# Altium PCB VoiceRecorder1.PcbDoc
Units mm, origin at the board's own origin, x right, y up, seen from the top; angles counter-clockwise.
Board outline 107.31 x 58.55 mm, 2 copper layers (Top Layer, Bottom Layer); 33 components, 36 nets, 132 pads, 0 vias.
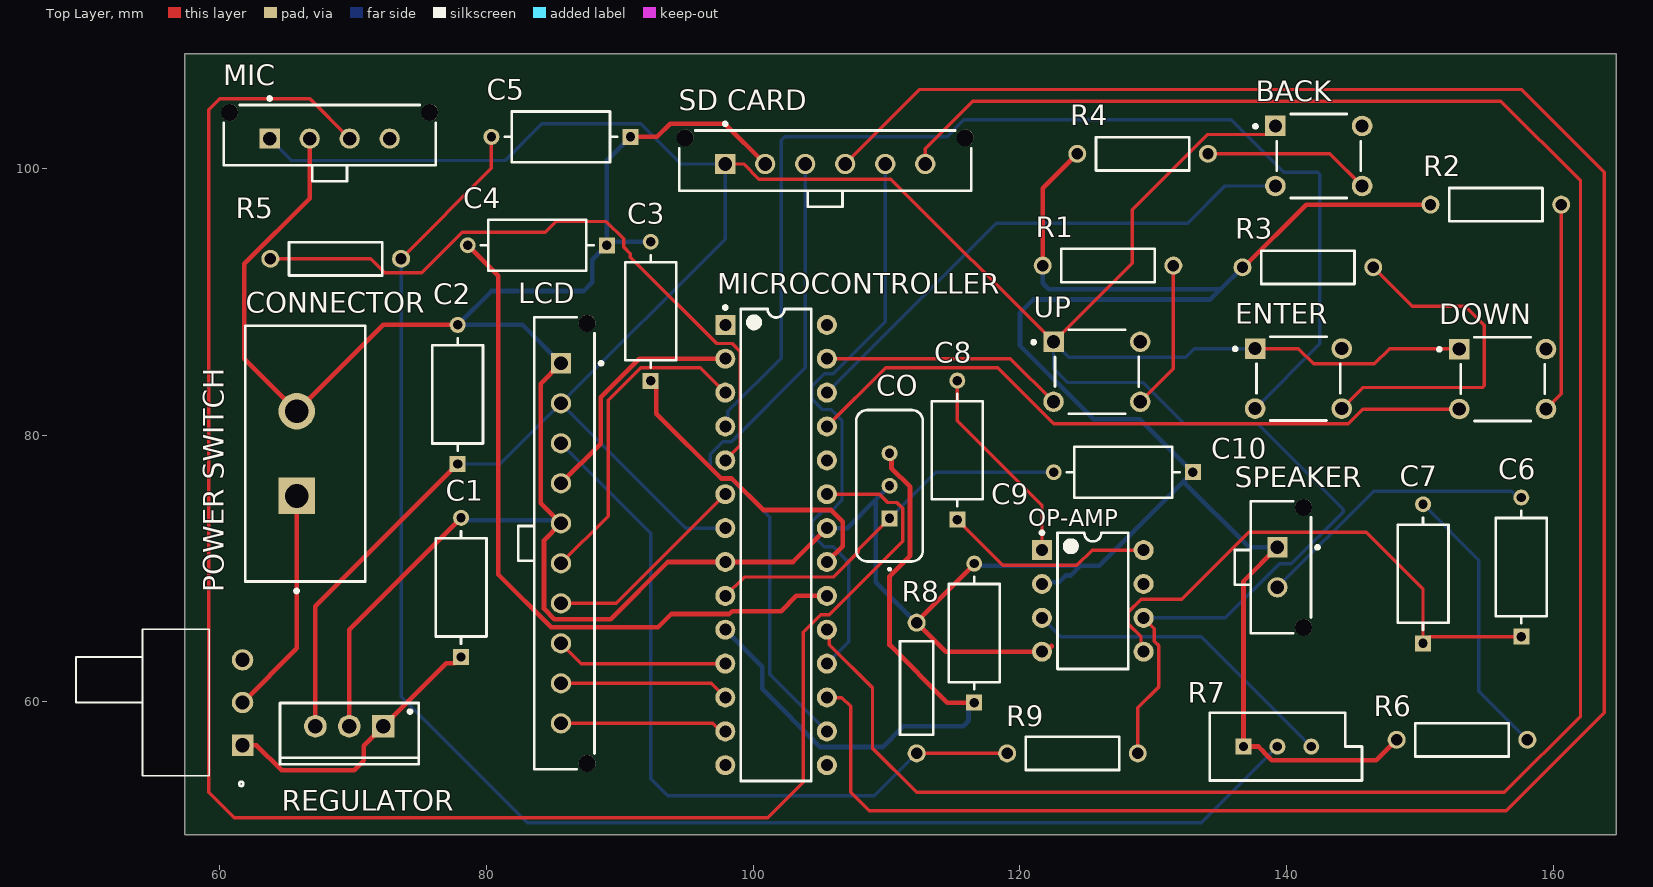
[diagram p0: Top Layer view]
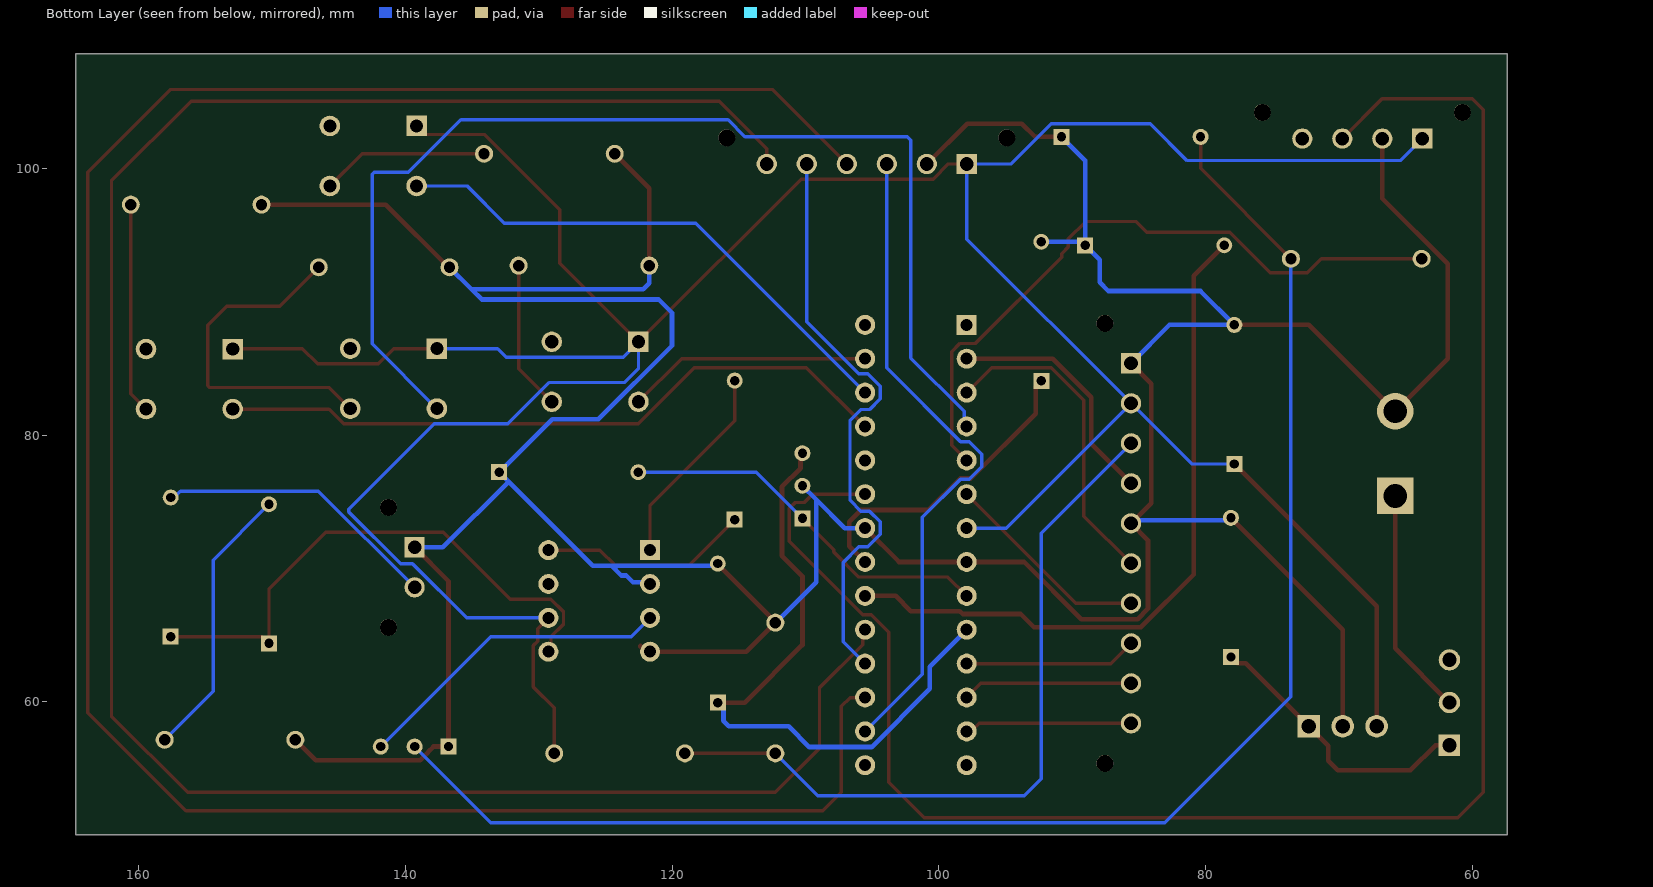
[diagram p1: Bottom Layer view, seen from below]
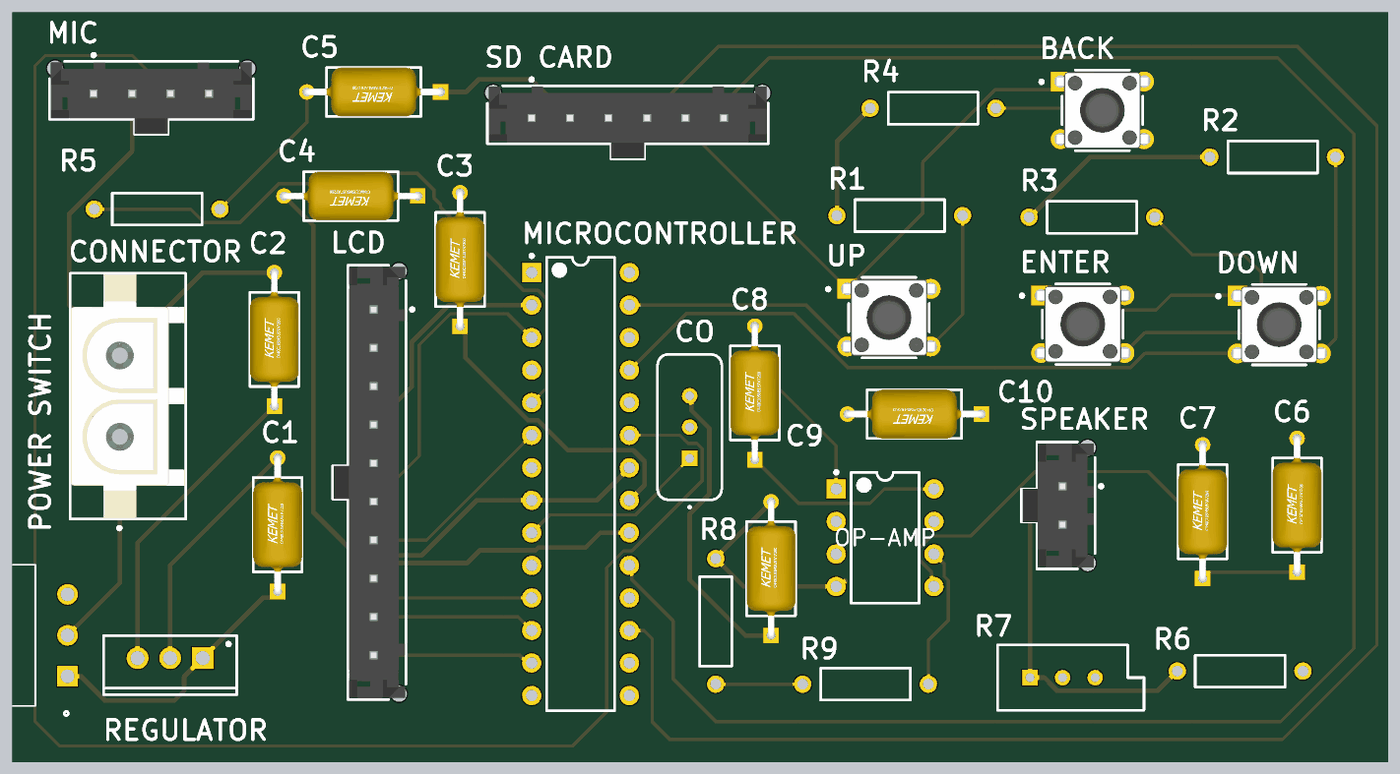
[diagram p2: 3D render of the assembled board from above, using the file's embedded part models]

## Layer stack, top to bottom
Top Solder: solder mask 0.0102, Solder Resist, Dk 3.5
Top Layer: signal copper 0.0356
Dielectric 1: dielectric 0.32, FR-4, Dk 4.8
Bottom Layer: signal copper 0.0356
Bottom Solder: solder mask 0.0102, Solder Resist, Dk 3.5

## Board outline
57.404,50.038 164.719,50.038 164.719,108.585 57.404,108.585

## Design rules (kind name [scope] priority, off if disabled: settings)
Clearance [All] p1: gap=0.254 ignorepadtopadclearanceinfootprint=FALSE except(0: Arc-Hole Track-Hole SMDPad-Hole THPad-Hole Via-Hole Fill-Hole Poly-Hole Region-Hole Text-Hole)
MinimumSolderMaskSliver [All] p1: minsoldermaskwidth=0.244
PolygonConnect [All] p1: connectstyle=Relief reliefconductorwidth=0.254 reliefentries=4 polygonreliefangle="90 Angle" airgapwidth=0.254
RoutingVias [All] p1: holewidth=0.711 width=1.27 viastyle="Through Hole" minholewidth=0.711 minwidth=1.27 maxholewidth=0.711 maxwidth=1.27
SilkToSolderMaskClearance [IsPad] p1 off: minsilkscreentomaskgap=0.254 clearancetoexposedcopper=TRUE
SolderMaskExpansion [All] p1: expansion=0.102 istentingtop=FALSE
Width [InNet('GND')] p1: maxlimit=0.35 minlimit=0.254 preferedwidth=0.35 minimp=50.000000 maximp=50.000000 favimp=50.000000
28 further rules are at their usual default settings.

## Components (designator, comment, footprint, x,y, rotation, side; value= is the part's Value field where it differs from the comment)
BACK "3-1825910-1" FP-3-1825910-1-MFG 142.419,100.929 r0 top
C1 "1uF" FP-C440-MFG 78.105,68.58 r90 top
C2 "1uF" FP-C440-MFG 77.851,83.05 r90 top
C3 "100nF" FP-C440-MFG 92.329,89.281 r90 top value=1uF
C4 "100nF" FP-C440-MFG 83.82,94.234 r180 top value=1uF
C5 "100nF" FP-C440-MFG 85.598,102.362 r180 top value=1uF
C6 "250uF" FP-C440-MFG 157.607,70.104 r90 top value=1uF
C7 "0.05uF" FP-C440-MFG 150.241,69.596 r90 top value=1uF
C8 "10uF" FP-C440-MFG 115.316,78.867 r90 top value=1uF
C9 "22pF" FP-C440-MFG 116.586,65.151 r90 top value=1uF
C10 "22pF" FP-C440-MFG 127.762,77.216 r180 top value=1uF
CO "ECS-200-20-4X" ECS-4X-3IL 110.236,76.2 r90 top
CONNECTOR "350428-1" FP-350428-1-MFG 66.421,78.613 r90 top
DOWN "3-1825910-1" FP-3-1825910-1-MFG 156.21,84.201 r0 top
ENTER "3-1825910-1" FP-3-1825910-1-MFG 140.895,84.237 r0 top
LCD "66201011122" 66201011122 85.852,71.882 r90 top
MIC "66200411122" 66200411122 68.254,102.49 r180 top
MICROCONTROLLER "ATmega328-PU" 28P3 101.727,71.755 r0 top
OP-AMP "LM386N-3" TI-P8 125.476,67.564 r0 top
"POWER SWITCH" "1825116-1" SW_1825116-1 61.722,56.744 r90 top
R1 "10k" OMTE-RES7X2.5-2 126.619,92.71 r0 top
R2 "10k" OMTE-RES7X2.5-2 155.702,97.282 r0 top
R3 "10k" OMTE-RES7X2.5-2 141.605,92.583 r0 top
R4 "10k" OMTE-RES7X2.5-2 129.212,101.092 r0 top
R5 "470" OMTE-RES7X2.5-2 68.707,93.218 r180 top
R6 "10k" OMTE-RES7X2.5-2 153.162,57.15 r0 top
R7 "RPot" VR5 139.319,56.642 r0 top value=10K
R8 "8k" OMTE-RES7X2.5-2 112.268,61.034 r90 top
R9 "2k" OMTE-RES7X2.5-2 123.952,56.134 r0 top
REGULATOR "L7805CV" TO220 69.723,58.166 r180 top
"SD CARD" "66200611122" 66200611122 105.41,100.584 r180 top
SPEAKER "66200211122" 66200211122 139.574,70.08 r90 top
UP "3-1825910-1" FP-3-1825910-1-MFG 125.782,84.745 r0 top

## Footprints (in the part's own frame and the unit in brackets; to place one, negate y for a bottom-side part, rotate by r counter-clockwise, add the part's x,y. Pads: shape width x height; smd on the part's side, far side on the other; paste and mask are expansions set on the pad)
28P3 [mm] "28-Pin Plastic Dual In-Line Package (PDIP)"
  rect 1.5x1.5 hole 0.9: 1(-3.81,16.51)
  round 1.5 hole 0.9: 2(-3.81,13.97) 3(-3.81,11.43) 4(-3.81,8.89) 5(-3.81,6.35) 6(-3.81,3.81) 7(-3.81,1.27) 8(-3.81,-1.27) 9(-3.81,-3.81) 10(-3.81,-6.35) 11(-3.81,-8.89) 12(-3.81,-11.43) 13(-3.81,-13.97) 14(-3.81,-16.51) 15(3.81,-16.51) 16(3.81,-13.97) 17(3.81,-11.43) 18(3.81,-8.89) 19(3.81,-6.35) 20(3.81,-3.81) 21(3.81,-1.27) 22(3.81,1.27) 23(3.81,3.81) 24(3.81,6.35) 25(3.81,8.89) 26(3.81,11.43) 27(3.81,13.97) 28(3.81,16.51)
  silkscreen extent -3.93,-17.7 2.65,17.93, body extent -3.6,-17.65 3.6,17.65, height 4.58
66200211122 [mm] "3.00mm Male Single Row Vertical Header, 2p"
  rect 1.52x1.52 hole 1.02: 1(1.5,0.255)
  round 1.52 hole 1.02: 2(-1.5,0.255)
  round 1.27 hole 1.27 unplated: MH1(-4.5,-1.705) MH2(4.5,-1.705)
  silkscreen extent -4.95,-2.88 4.95,3.46, body extent -4.83,-2.18 4.83,3.38, height 9.93
66200411122 [mm] "3.00mm Male Single Row Vertical Header, 4p"
  rect 1.52x1.52 hole 1.02: 1(4.5,0.255)
  round 1.52 hole 1.02: 2(1.5,0.255) 3(-1.5,0.255) 4(-4.5,0.255)
  round 1.27 hole 1.27 unplated: MH1(-7.5,-1.705) MH2(7.5,-1.705)
  silkscreen extent -7.95,-2.87 7.95,3.46, body extent -7.82,-2.19 7.83,3.38, height 9.93
66200611122 [mm] "3.00mm Male Single Row Vertical Header, 6p"
  rect 1.52x1.52 hole 1.02: 1(7.5,0.255)
  round 1.52 hole 1.02: 2(4.5,0.255) 3(1.5,0.255) 4(-1.5,0.255) 5(-4.5,0.255) 6(-7.5,0.255)
  round 1.27 hole 1.27 unplated: MH1(-10.5,-1.705) MH2(10.5,-1.705)
  silkscreen extent -10.95,-2.87 10.95,3.46, body extent -10.82,-2.19 10.83,3.38, height 9.93
66201011122 [mm] "3.00mm Male Single Row Vertical Header, 10p"
  rect 1.52x1.52 hole 1.02: 1(13.5,0.255)
  round 1.52 hole 1.02: 2(10.5,0.255) 3(7.5,0.255) 4(4.5,0.255) 5(1.5,0.255) 6(-1.5,0.255) 7(-4.5,0.255) 8(-7.5,0.255) 9(-10.5,0.255) 10(-13.5,0.255)
  round 1.27 hole 1.27 unplated: MH1(-16.5,-1.705) MH2(16.5,-1.705)
  silkscreen extent -16.95,-2.88 16.95,3.46, body extent -16.82,-2.19 16.83,3.38, height 9.93
ECS-4X-3IL [mm]
  rect 1.2x1.2 hole 0.7: 1(-2.44,0)
  round 1.2 hole 0.7: 2(0,0) 3(2.44,0)
  silkscreen extent -6.34,-2.5 5.68,2.5, body extent -5.68,-2.5 5.68,2.5, height 3.5
FP-3-1825910-1-MFG [mm]
  rect 1.54x1.54 hole 0.99 paste-1000 mask+0: 1(-3.25,2.25)
  round 1.54 hole 0.99 paste-1000 mask+0: 2(3.25,2.25) 3(-3.25,-2.25) 4(3.25,-2.25)
  silkscreen extent -4.87,-3.15 3.15,3.15, body extent -4.12,-3.24 4.12,3.24, height 0.25
FP-350428-1-MFG [mm]
  rect 2.73x2.73 hole 1.78 paste-1000 mask+0: 1(-3.175,0.635)
  round 2.73 hole 1.78 paste-1000 mask+0: 2(3.175,0.635)
  silkscreen extent -10.42,-4.51 9.59,4.51, body extent -9.69,-4.61 9.69,4.61, height 0.25
FP-C440-MFG [mm]
  rect 1.2x1.2 hole 0.7 paste-1000 mask+0: 1(-5.215,0)
  round 1.2 hole 0.7 paste-1000 mask+0: 2(5.215,0)
  silkscreen extent -4.21,-1.91 4.21,1.91, body extent -5.91,-2 5.91,2, height 0.25
OMTE-RES7X2.5-2 [mm] "Resistor, Axial; Body 7x2.5mm, Lead Dia. 0.6mm"
  round 1.35 hole 0.85: 1(-4.9,0) 2(4.9,0)
  silkscreen extent -3.5,-1.25 3.5,1.25, body extent -3.5,-1.25 3.5,1.25, height 2.5
SW_1825116-1 [mm]
  rect 1.605x1.605 hole 1.07: 1(0,0)
  round 1.605 hole 1.07: 2(3.2,0) 3(6.4,0)
  silkscreen extent -3.06,-0.06 8.7,12.5
TI-P8 [mm] "DIP, 8-Leads, Body 10.15x6.6mm, Pitch 2.54mm"
  rect 1.5x1.5 hole 0.9: 1(-3.81,3.81)
  round 1.5 hole 0.9: 2(-3.81,1.27) 3(-3.81,-1.27) 4(-3.81,-3.81) 5(3.81,-3.81) 6(3.81,-1.27) 7(3.81,1.27) 8(3.81,3.81)
  silkscreen extent -3.93,-5.1 2.65,5.23, body extent -3.95,-5.07 3.95,5.07, height 5.08
TO220 [mm] "TO, Thru-Hole, Vertical, Heatsink Mounted; 3 In-Line Leads; Pitch 2.54 mm"
  rect 1.7x1.7 hole 1.1: 1(-2.54,0)
  round 1.7 hole 1.1: 2(0,0) 3(2.54,0)
  silkscreen extent -5.2,-1.75 5.2,2.85, body extent -5.25,-1.8 5.25,2.9, height 19.7
VR5 [mm] "Thru-Hole; 3 Leads"
  rect 1.2x1.2 hole 0.7: 1(-2.54,0)
  round 1.2 hole 0.7: 2(0,0) 3(2.54,0)
  silkscreen extent -5.08,-2.54 6.35,2.54

## Part data
BACK DOWN ENTER UP: library part CMP-03407-000001-1, "SWITCH TACTILE SPST-NO 0.05A 24V", Contact Current Rating=50mA, Contact Resistance=100mΩ, Manufacturer="TE Connectivity", Operating Force=160gf, Package=0, Temperature="-35°C to +85°C", Temperature Range High=+85°C, Temperature Range Low=-35°C, Automotive=No, Category=Switch, ComponentLink2Description=Datasheet, ComponentLink2URL=https://www.te.com/commerce/DocumentDelivery/DDEController?Action=srchrtrv&DocNm=1825910&DocType=Customer+Drawing&DocLang=English, Device Class L1=Electromechanical, Device Class L2=Switches, Device Class L3="Tactile Switches", Digikey Description="SWITCH TACTILE SPST-NO 0.05A 24V", Electromechanical Life=100000Cycles, Height=17.3mm, Lead Free=Yes, Manufacturer Part Number=3-1825910-1, Mount="Through Hole", Octopart=https://octopart.com/3-1825910-1-te+connectivity-46506874, RoHS=TRUE, Throw Configuration=SPST-NO
C1 C2: library part CMP-03020-013956-1, "CAP CER 1UF 50V Z5U AXIAL", Manufacturer=Kemet, Manufacturer Part Number=C440C105M5U5TA7200, Package=C440, Temperature="-10°C to +85°C", Temperature Characteristic=Z5U, Temperature Range High=+85°C, Temperature Range Low=-10°C, Tolerance=20%, Voltage Rating=50V, Automotive=No, Capacitance=1uF, Category=Cap, ComponentLink2Description=Datasheet, ComponentLink2URL=https://content.kemet.com/datasheets/KEM_C1042_AXIMAX_Z5U.pdf, Device Class L1="Passive Components", Device Class L2=Capacitors, Device Class L3="Ceramic Capacitors", Digikey Description="CAP CER 1UF 50V Z5U AXIAL", Height=3.81mm, Ipc Land Pattern Name=CAPAD1043W70L736D381, Lead Free=Yes, Material=Ceramic, Mouser Description="Multilayer Ceramic Capacitors MLCC - Leaded 50volts 1uF 20%", Octopart=https://octopart.com/c440c105m5u5ta7200-kemet-193612, RoHS=TRUE
C3 C4 C5 C6 C7 C8 C9 C10: library part CMP-03020-013956-1, "CAP CER 1UF 50V Z5U AXIAL", Capacitance=1uF, Manufacturer=Kemet, Manufacturer Part Number=C440C105M5U5TA7200, Package=C440, Temperature="-10°C to +85°C", Temperature Characteristic=Z5U, Temperature Range High=+85°C, Temperature Range Low=-10°C, Tolerance=20%, Voltage Rating=50V, Automotive=No, Category=Cap, ComponentLink2Description=Datasheet, ComponentLink2URL=https://content.kemet.com/datasheets/KEM_C1042_AXIMAX_Z5U.pdf, Device Class L1="Passive Components", Device Class L2=Capacitors, Device Class L3="Ceramic Capacitors", Digikey Description="CAP CER 1UF 50V Z5U AXIAL", Height=3.81mm, Ipc Land Pattern Name=CAPAD1043W70L736D381, Lead Free=Yes, Material=Ceramic, Mouser Description="Multilayer Ceramic Capacitors MLCC - Leaded 50volts 1uF 20%", Octopart=https://octopart.com/c440c105m5u5ta7200-kemet-193612, RoHS=TRUE
CO: library part CMP-1669-00001-2, "CRYSTAL 20.000MHZ 20PF 49US", Manufacturer=ECS, ComponentLink1Description=Datasheet, ComponentLink1URL=http://www.ecsxtal.com/store/pdf/hc-49usx.pdf, PackageReference=4X-3IL, PartNumber=ECS-200-20-4X
CONNECTOR: library part CMP-03369-000080-1, "CONN HEADER VERT 2POS 6.35MM", Current Rating=12A, Manufacturer="TE Connectivity", Temperature="-40°C to +105°C", Temperature Range High=+105°C, Temperature Range Low=-40°C, Voltage Rating=600V, Automotive=No, Category=Conn, ComponentLink2Description=Datasheet, ComponentLink2URL=https://www.te.com/commerce/DocumentDelivery/DDEController?Action=showdoc&DocId=Customer+Drawing%7F350428%7FY2%7Fpdf%7FEnglish%7FENG_CD_350428_Y2.pdf%7F350428-1, Conn Gender=Male, Conn Orientation=Vertical, Contact Material=Gold,Nickel, Device Class L1=Connectors, Device Class L2="Headers and Wire Housings", Device Class L3=unset, Digikey Description="CONN HEADER VERT 2POS 6.35MM", Height=14.99mm, Lead Free=Yes, Manufacturer Part Number=350428-1, Mouser Description="Connector, Soft Shell; Universal MATE-N-LOK; 2; Nylon; Natural; 19 A; 600 VAC", Number Of Contacts=2, Number Of Rows=1, Octopart=https://octopart.com/350428-1-te+connectivity-46505355, Package=350428-1, Pitch=6.35mm, RoHS=TRUE, Standoff Height=0.63mm
LCD: library part CMP-1502-00448-1, "THT Male Header WR-MPC3, Vertical, Single Row, pitch 3 mm, 10 pins", Contact Resistance=10mOhm, Manufacturer="Wurth Elektronik", Operating Temperature=-40to105degC, Working Voltage=250VAC, Datasheet URL=https://katalog.we-online.de/em/datasheet/6620xx11122.pdf, Gender=Male, Manufacturer URL=http://www.we-online.de, Mounting Technology=THT, Orientation=Vertical, Package Reference=66201011122, Packaging=Tube, Part Number=66201011122, Pin Number=10, Pitch=3mm, Publisher=WurthElektronik
MIC: library part CMP-1502-00442-1, "THT Male Header WR-MPC3, Vertical, Single Row, pitch 3 mm, 4 pins", Contact Resistance=10mOhm, Manufacturer="Wurth Elektronik", Operating Temperature=-40to105degC, Working Voltage=250VAC, Datasheet URL=https://katalog.we-online.de/em/datasheet/6620xx11122.pdf, Gender=Male, Manufacturer URL=http://www.we-online.de, Mounting Technology=THT, Orientation=Vertical, Package Reference=66200411122, Packaging=Tube, Part Number=66200411122, Pin Number=4, Pitch=3mm, Publisher=WurthElektronik
MICROCONTROLLER: library part CMP-0095-00015-2, "8-bit AVR Microcontroller, 32KB Flash, 1KB EEPROM, 2KB SRAM, 28-pin PDIP, Industrial Grade (-40°C to 85°C)", ComponentLink1Description="Manufacturer URL", ComponentLink1URL=http://www.atmel.com/, ComponentLink2Description="ATmega48A/48PA/88A/88PA/168A/168PA/328/328P Datasheet", ComponentLink2URL=http://www.atmel.com/dyn/resources/prod_documents/8271.pdf, ComponentLink3Description="ATmega48A/48PA/88A/88PA/168A/168PA/328/328P Summary", ComponentLink3URL=http://www.atmel.com/dyn/resources/prod_documents/8271S.pdf, DatasheetVersion="revD, May-2011", PackageDescription="28-lead (0.300\"/7.62mm Wide) Plastic Dual Inline Package (PDIP)", PackageReference=28P3, PackageVersion="revB, Sep-2001", RevisionNote="DatasheetVersion updated. URLs added."
OP-AMP: library part CMP-0057-00053-3, "Low Voltage Audio Power Amplifier, 0 to 70 degC, 8-pin DIP (P8)", Manufacturer="Texas Instruments", Code_JEDEC=MS-001, ComponentLink1Description="Manufacturer URL", ComponentLink1URL=http://www.ti.com/, ComponentLink2Description=Datasheet, ComponentLink2URL=http://www.ti.com/general/docs/lit/getliterature.tsp?genericPartNumber=LM386&fileType=pdf, ComponentLink3Description="Package Specification", ComponentLink3URL=http://www.ti.com/litv/pdf/mpdi001b, DatasheetVersion=SNAS545A, Input Type=Analog, Max. Number of Speaker Outputs=1, Mounting Technology="Through Hole", PackageDescription="8-Pin Plastic In-Line, Body 9.59 x 6.35 mm, Pitch 2.54 mm", PackageReference=P8, PackageVersion="4040082/E, 04/2010", PartNumber=LM386N-3, SubFamily="Mid/High-Power Amplifier"
"POWER SWITCH": "Slide Switch SPDT Through Hole, Right Angle", Package=None, Availability=Unavailable, EU_RoHS_Compliance=Compliant, MF="TE Connectivity", MP=1825116-1, Price=None, SnapEDA_Link=https://www.snapeda.com/parts/1825116-1/TE%20Connectivity%20ALCOSWITCH%20Switches/view-part/497270/?ref=snap, TE_purchase_URL=https://www.te.com/usa-en/product-1825116-1.html?te_bu=Cor&te_type=disp&te_campaign=seda_glo_cor-seda-global-disp-prtnr-fy19-seda-model-bom-cta_sma-317_1&elqCampaignId=32493
R1 R2 R3 R4 R6: library part CMP-2000-06865-1, "Little Demon(R) Carbon Composition Molded OD Series, 250 V, 10 KOhm, +/-5%, -70 to 130 degC, 2-Pin THD, RoHS, Bulk", Manufacturer=Ohmite, Operating Temperature=-, Package / Case=Axial, Package Description="2-Pin THD Resistor, Body 7 x 2.5 mm, Lead Dia. 0.6 mm", Package Reference=RES7X2.5, PartNumber=OD103JE, Power (Watts)=0.25W,1/4W, Power Rating=0.25W, Standard Package=100, Tolerance=±5%, Catalog Drawings=OD,OF,OASeries, Category=Resistors, Composition=CarbonComposition, Datasheet URL=http://www.ohmite.com/cat/res_od_of_oa.pdf, Datasheet Version=06/2016, EDA / CAD Models=DownloadfromAcceleratedDesigns, Family=ThroughHoleResistors, Features=PulseWithstanding, Height=-, Manufacturer URL=http://www.ohmite.com/, Mounting Technology=ThroughHole, Number of Terminations=2, Online Catalog=OD,OF,OASeries,LittleDemon®, Packaging=Bulk, Resistance (Ohms)=10k, RoHS Information="LittleDemon\"E\"SeriesMaterialDeclaration", Series=LittleDemon®OD, Size / Dimension="0.098\"Diax0.276\"L(2.50mmx7.00mm)", Supplier Device Package=Axial, Temperature Coefficient=-
R5 R8 R9: library part CMP-2000-06865-1, "Little Demon(R) Carbon Composition Molded OD Series, 250 V, 10 KOhm, +/-5%, -70 to 130 degC, 2-Pin THD, RoHS, Bulk", Manufacturer=Ohmite, Operating Temperature=-, Package / Case=Axial, Package Description="2-Pin THD Resistor, Body 7 x 2.5 mm, Lead Dia. 0.6 mm", Package Reference=RES7X2.5, PartNumber=OD103JE, Power (Watts)=0.25W,1/4W, Power Rating=0.25W, Resistance (Ohms)=10k, Standard Package=100, Tolerance=±5%, Catalog Drawings=OD,OF,OASeries, Category=Resistors, Composition=CarbonComposition, Datasheet URL=http://www.ohmite.com/cat/res_od_of_oa.pdf, Datasheet Version=06/2016, EDA / CAD Models=DownloadfromAcceleratedDesigns, Family=ThroughHoleResistors, Features=PulseWithstanding, Height=-, Manufacturer URL=http://www.ohmite.com/, Mounting Technology=ThroughHole, Number of Terminations=2, Online Catalog=OD,OF,OASeries,LittleDemon®, Packaging=Bulk, RoHS Information="LittleDemon\"E\"SeriesMaterialDeclaration", Series=LittleDemon®OD, Size / Dimension="0.098\"Diax0.276\"L(2.50mmx7.00mm)", Supplier Device Package=Axial, Temperature Coefficient=-
R7: "Potentiometer", LatestRevisionDate=17-Jul-2002, LatestRevisionNote="Re-released for DXP Platform.", PackageDescription="Variable Resistor, Thru-Hole; 3 Leads", PackageReference=VR5, Published=8-Jun-2000, Publisher="Altium Limited", Set Position=0.5, Sim Note="Enter the Resistance value and the set point into parameter fields."
REGULATOR: library part CMP-0244-00483-1, "Positive Voltage Regulator, 5V, 3-Pin TO-220", ComponentLink1Description="Manufacturer URL", ComponentLink1URL=http://www.st.com, ComponentLink2Description=Datasheet, ComponentLink2URL=http://www.st.com/internet/com/TECHNICAL_RESOURCES/TECHNICAL_LITERATURE/DATASHEET/CD00000444.pdf, ComponentLink3Description="Package Specification", ComponentLink3URL=http://www.st.com/internet/com/TECHNICAL_RESOURCES/TECHNICAL_LITERATURE/PACKAGE_INFORMATION/CD00004649.pdf, DatasheetVersion=16/11/2011, PackageDescription="TO, Thru-Hole, Vertical, Heatsink Mounted; 3 In-Line Leads; Pitch 2.54 mm", PackageReference=TO220, PackageVersion=ver3.0
"SD CARD": library part CMP-1502-00444-1, "THT Male Header WR-MPC3, Vertical, Single Row, pitch 3 mm, 6 pins", Contact Resistance=10mOhm, Manufacturer="Wurth Elektronik", Operating Temperature=-40to105degC, Working Voltage=250VAC, Datasheet URL=https://katalog.we-online.de/em/datasheet/6620xx11122.pdf, Gender=Male, Manufacturer URL=http://www.we-online.de, Mounting Technology=THT, Orientation=Vertical, Package Reference=66200611122, Packaging=Tube, Part Number=66200611122, Pin Number=6, Pitch=3mm, Publisher=WurthElektronik
SPEAKER: library part CMP-1502-00440-1, "THT Male Header WR-MPC3, Vertical, Single Row, pitch 3 mm, 2 pins", Contact Resistance=10mOhm, Manufacturer="Wurth Elektronik", Operating Temperature=-40to105degC, Working Voltage=250VAC, Datasheet URL=https://katalog.we-online.de/em/datasheet/6620xx11122.pdf, Gender=Male, Manufacturer URL=http://www.we-online.de, Mounting Technology=THT, Orientation=Vertical, Package Reference=66200211122, Packaging=Tube, Part Number=66200211122, Pin Number=2, Pitch=3mm, Publisher=WurthElektronik

## Nets (pads, with @x,y where several pads share a name; then routed paths per layer and width w, separated by ;. In a path a pad name is that pad's centre, name@x,y a point inside that pad or via, vN(x,y) a via of type N, cw(c..) or ccw(c..) an arc to the next point about the centre after c; other vN are vias at no path point)
8: C8.1 OP-AMP.8 | length 15.9
  Top Layer w0.254: C8.1 118.725,70.243 124.288,70.243 125.419,71.374 OP-AMP.8
9: C10.2 CO.1 MICROCONTROLLER.9 | length 28.6
  Top Layer w0.254: MICROCONTROLLER.9 99.326,69.354 106.005,69.354 107.884,71.233 107.884,71.408 CO.1
  Bottom Layer w0.254: CO.1 113.692,77.216 C10.2
10: C9.1 CO.3 MICROCONTROLLER.10 | length 49
  Top Layer w0.35: CO.3 110.376,78.5 110.376,77.515 111.773,76.118 111.773,70.959 110.236,69.422 110.236,64.262 114.562,59.936 C9.1
  Bottom Layer w0.35: MICROCONTROLLER.10 100.687,62.635 100.687,60.968 105.049,56.606 109.72,56.606 111.28,58.166 115.746,58.166 116.161,58.581 116.161,59.511 C9.1
B2: "SD CARD.3" MICROCONTROLLER.16 | length 49.9
  Bottom Layer w0.254: 103.91,100.329 103.91,85.038 98.385,79.514 97.727,79.514 96.786,78.573 96.786,77.637 97.727,76.696 98.385,76.696 101.243,73.839 101.243,62.079 MICROCONTROLLER.16
B3: "SD CARD.4" MICROCONTROLLER.17 | length 171
  Top Layer w0.254: MICROCONTROLLER.17 105.547,60.315 106.668,60.315 107.315,59.668 107.315,53.213 108.712,51.816 156.464,51.816 163.83,59.182 163.83,99.695 157.607,105.918 112.499,105.918 106.91,100.329
B4: "SD CARD.5" MICROCONTROLLER.18 | length 45
  Bottom Layer w0.254: MICROCONTROLLER.18 107.176,64.504 107.176,70.445 106.005,71.616 105.347,71.616 104.406,72.557 104.406,73.493 105.208,74.295 105.866,74.295 106.668,75.097 106.668,81.113 105.866,81.915 105.208,81.915 104.406,82.717 104.406,83.653 105.347,84.594 106.005,84.594 109.91,88.498 109.91,100.329
B5: "SD CARD.6" MICROCONTROLLER.19 | length 161.5
  Top Layer w0.254: MICROCONTROLLER.19 105.727,65.215 105.727,64.274 108.958,61.043 108.958,56.523 112.268,53.213 156.337,53.213 162.052,58.928 162.052,99.06 156.083,105.029 116.459,105.029 112.91,101.48 112.91,100.329
C0: MIC.3 MICROCONTROLLER.23 | length 139.9
  Top Layer w0.254: MIC.3 66.778,105.211 59.999,105.211 59.182,104.394 59.182,53.213 61.087,51.308 101.092,51.308 103.759,53.975 103.759,65.226 105.069,66.536 105.727,66.536 111.217,72.026 111.217,74.518 110.792,74.943 110.105,74.943 109.484,75.565 MICROCONTROLLER.23
C2: DOWN.3 MICROCONTROLLER.25 | length 51.5
  Top Layer w0.254: MICROCONTROLLER.25 109.955,85.063 118.336,85.063 122.563,80.836 144.622,80.836 145.737,81.951 DOWN.3
C3: BACK.3 MICROCONTROLLER.26 | length 40
  Bottom Layer w0.254: MICROCONTROLLER.26 118.237,95.885 132.588,95.885 135.382,98.679 BACK.3
C4: MICROCONTROLLER.27 UP.3 | length 18.3
  Top Layer w0.254: MICROCONTROLLER.27 119.302,85.725 UP.3
D0: LCD.4 MICROCONTROLLER.2 | length 18.2
  Top Layer w0.35: LCD.4 88.581,79.366 88.581,82.843 91.463,85.725 MICROCONTROLLER.2
D1: LCD.6 MICROCONTROLLER.3 | length 24.3
  Top Layer w0.254: LCD.6 89.137,73.922 89.137,82.613 91.571,85.047 96.055,85.047 MICROCONTROLLER.3
D2: ENTER.3 MICROCONTROLLER.4 | length 85.5
  Bottom Layer w0.254: MICROCONTROLLER.4 98.107,80.835 98.107,81.776 102.108,85.777 102.108,102.108 102.362,102.362 114.546,102.362 115.816,103.632 135.844,103.632 139.781,99.695 142.345,99.695 142.494,99.546 142.494,86.836 ENTER.3
D3: MICROCONTROLLER.5 R5.2 | length 50.4
  Top Layer w0.254: R5.2 71.318,93.218 72.374,92.162 75.146,92.162 78.199,95.215 84.42,95.215 85.217,96.012 88.996,96.012 90.299,94.709 90.299,94.105 90.805,93.599 90.805,93.338 97.275,86.868 98.425,86.868 99.048,86.245 99.048,79.236 MICROCONTROLLER.5
D4: LCD.7 MICROCONTROLLER.6 | length 15.7
  Top Layer w0.254: LCD.7 89.734,67.382 MICROCONTROLLER.6
D5: LCD.8 MICROCONTROLLER.11 | length 13
  Top Layer w0.254: LCD.8 85.597,64.263 85.725,64.135 85.844,64.135 87.114,62.865 MICROCONTROLLER.11
D6: LCD.9 MICROCONTROLLER.12 | length 12.8
  Top Layer w0.254: LCD.9 96.86,61.382 MICROCONTROLLER.12
D7: LCD.10 MICROCONTROLLER.13 | length 12.6
  Top Layer w0.254: LCD.10 96.983,58.382 97.58,57.785 MICROCONTROLLER.13
GND: "SD CARD.2" C1.2 C2.2 C3.2 C4.1 C5.1 C9.2 C10.1 CO.2 CONNECTOR.2 LCD.1 LCD.5 MIC.2 MICROCONTROLLER.8 MICROCONTROLLER.22 OP-AMP.2 OP-AMP.4 R1.1 R2.1 R3.1 R4.1 R6.1 R7.1 R8.2 REGULATOR.2 SPEAKER.1 | length 329.5
  Top Layer w0.254: R3.1 R3.1@136.779,92.583
  Top Layer w0.35: MIC.2 66.754,97.742 61.849,92.837 61.849,85.725 CONNECTOR.2 72.263,88.265 C2.2 ; REGULATOR.2 69.723,65.413 C1.2 ; LCD.1 84.074,83.859 84.074,74.905 LCD.5 84.328,72.113 84.328,66.97 85.105,66.193 89.331,66.193 93.623,70.485 102.997,70.485 MICROCONTROLLER.22 ; C5.1 92.799,102.362 93.79,103.353 97.886,103.353 100.91,100.329 ; C9.2 116.586,70.309 112.268,65.991 R8.2 114.448,63.754 OP-AMP.4 OP-AMP.4@121.977,63.754 ; R1.1 121.719,98.499 R4.1 ; 122.375,64.152 122.375,64.212 ; R3.1@136.779,92.583 141.478,97.282 R2.1 ; SPEAKER.1 136.779,69.04 R7.1 137.904,56.642 138.29,56.256 138.29,56.216 138.893,55.613 146.725,55.613 R6.1
  Bottom Layer w0.254: C1.2 C1.2@78.286,73.614 ; LCD.5@85.365,73.614 LCD.5
  Bottom Layer w0.35: C1.2@78.286,73.614 LCD.5@85.365,73.614 ; LCD.1 82.714,88.265 C2.2 80.391,90.805 87.298,90.805 87.954,91.461 87.954,93.153 C4.1 ; C5.1 89.035,100.584 C4.1 ; C3.2 89.297,94.496 C4.1 ; MICROCONTROLLER.22 107.061,73.025 109.207,75.171 ; CO.2 109.207,75.171 ; R8.2 112.247,65.934 109.207,68.974 109.207,75.171 ; C9.2 116.816,70.366 116.987,70.195 124.551,70.195 ; OP-AMP.2 121.798,68.966 122.941,68.966 123.444,69.469 123.825,69.469 124.551,70.195 ; R1.1 121.719,91.387 122.174,90.932 135.054,90.932 ; R3.1 135.054,90.932 ; SPEAKER.1 137.208,71.58 132.275,76.513 ; 124.551,70.195 125.956,70.195 132.275,76.513 ; 132.275,76.513 C10.1 128.995,81.198 125.533,81.198 120.015,86.717 120.015,89.154 121.031,90.17 134.292,90.17 135.054,90.932
NetBACK_4: BACK.4 R4.2 | length 12.6
  Top Layer w0.254: R4.2 143.256,101.092 BACK.4
NetC1_1: "POWER SWITCH.1" C1.1 REGULATOR.1 | length 21.3
  Top Layer w0.254: C1.1@77.632,62.892 C1.1
  Top Layer w0.35: 61.722,56.744 62.763,56.744 64.643,54.864 70.082,54.864 70.811,55.593 70.811,56.714 REGULATOR.1 76.989,62.892 C1.1@77.632,62.892
NetC3_1: C3.1 MICROCONTROLLER.21 | length 23.5
  Top Layer w0.35: C3.1 92.754,83.641 92.754,81.601 97.611,76.744 98.405,76.744 100.763,74.386 105.843,74.386 106.716,73.513 106.716,71.664 MICROCONTROLLER.21
NetC4_2: C4.2 MICROCONTROLLER.20 | length 52.9
  Top Layer w0.35: C4.2 80.899,91.94 80.899,69.544 84.854,65.589 92.875,65.589 93.87,66.584 98.223,66.584 98.441,66.802 102.108,66.802 103.251,67.945 MICROCONTROLLER.20
NetC5_2: C5.2 R5.1 R7.2 | length 116.8
  Top Layer w0.254: R5.1 80.383,99.994 C5.2
  Bottom Layer w0.254: R5.1 73.607,60.378 83.058,50.927 133.604,50.927 R7.2
NetC6_1: C6.1 C7.1 OP-AMP.5 | length 41.4
  Top Layer w0.254: OP-AMP.5 129.096,63.944 129.096,64.885 128.155,65.826 128.155,66.762 129.096,67.703 132.157,67.703 137.175,72.721 145.973,72.721 150.241,68.453 C7.1 150.749,64.889 C6.1
NetC6_2: C6.2 SPEAKER.2 | length 21.5
  Bottom Layer w0.254: SPEAKER.2 146.531,75.792 156.878,75.792 157.351,75.319 C6.2
NetC7_2: C7.2 R6.2 | length 20.9
  Bottom Layer w0.254: C7.2 154.432,70.62 154.432,60.78 R6.2
NetC8_2: C8.2 OP-AMP.1 | length 15.3
  Top Layer w0.254: C8.2 115.316,81.087 121.666,74.737 OP-AMP.1
NetCONNECTOR_1: "POWER SWITCH.2" CONNECTOR.1 | length 17.2
  Top Layer w0.35: 61.722,59.944 65.786,64.008 CONNECTOR.1
NetDOWN_4: DOWN.4 R2.2 | length 15.8
  Top Layer w0.254: DOWN.4 160.611,83.102 160.611,97.273 R2.2
NetENTER_4: ENTER.4 R3.2 | length 26.1
  Top Layer w0.254: ENTER.4 145.724,83.566 154.686,83.566 154.835,83.715 154.835,88.243 153.416,89.662 149.426,89.662 R3.2
NetLCD_3: LCD.3 R8.1 R9.1 | length 56.5
  Top Layer w0.254: R8.1 R9.1
  Bottom Layer w0.254: LCD.3 92.329,72.65 92.329,54.229 93.599,52.959 109.093,52.959 R8.1
NetOP-AMP_3: OP-AMP.3 R7.3 | length 24.2
  Bottom Layer w0.254: OP-AMP.3 123.075,64.885 133.616,64.885 R7.3
NetR1_2: R1.2 UP.4 | length 11.2
  Top Layer w0.254: UP.4 131.519,84.982 R1.2
VCC: "SD CARD.1" BACK.1 C2.1 DOWN.1 ENTER.1 LCD.2 MIC.1 MICROCONTROLLER.7 OP-AMP.6 R9.2 REGULATOR.3 UP.1 | length 256.1
  Top Layer w0.254: 97.91,100.329 99.296,100.329 100.437,99.188 110.339,99.188 UP.1 128.425,92.888 128.425,96.898 134.063,102.536 138.526,102.536 BACK.1 ; R9.2 128.852,59.544 130.417,61.109 130.417,64.222 130.086,64.554 130.086,65.494 OP-AMP.6 ; ENTER.1 140.879,86.487 142.03,85.336 146.598,85.336 147.749,86.487 152.924,86.487 DOWN.1
  Top Layer w0.35: REGULATOR.3 67.183,67.167 C2.1
  Bottom Layer w0.254: MIC.1 65.403,100.586 81.399,100.586 84.156,103.343 91.571,103.343 94.585,100.329 97.91,100.329 97.91,94.695 LCD.2 ; C2.1 81.05,77.835 LCD.2 ; MICROCONTROLLER.7 94.954,73.025 LCD.2 ; OP-AMP.6 135.419,66.294 139.476,70.35 140.371,70.35 144.252,74.231 144.252,74.442 137.858,80.836 132.319,80.836 129.208,83.947 123.571,83.947 122.532,84.986 UP.1 123.683,85.844 132.457,85.844 133.1,86.487 ENTER.1 ; DOWN.1@152.908,86.487 DOWN.1@152.944,86.451
pads on no net: "POWER SWITCH.3" "SD CARD.MH1" "SD CARD.MH2" BACK.2 DOWN.2 ENTER.2 LCD.MH1 LCD.MH2 MIC.4 MIC.MH1 MIC.MH2 MICROCONTROLLER.1 MICROCONTROLLER.14 MICROCONTROLLER.15 MICROCONTROLLER.24 MICROCONTROLLER.28 OP-AMP.7 SPEAKER.MH1 SPEAKER.MH2 UP.2